# Altium PCB SSOP-TSSOP14.PcbDoc
Units mil, origin at the board's own origin, x right, y up, seen from the top; angles counter-clockwise.
Board outline 800 x 700 mil, 2 copper layers (Top Layer, Bottom Layer); 3 components, 14 nets, 28 pads, 0 vias.
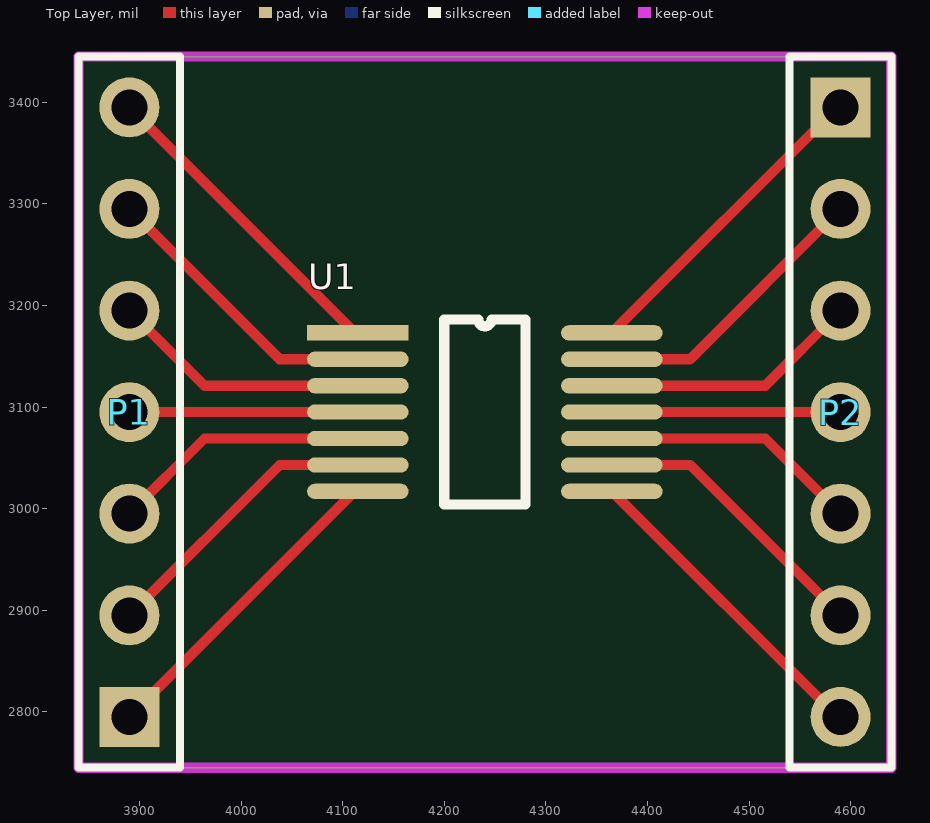
[diagram p0: Top Layer view]
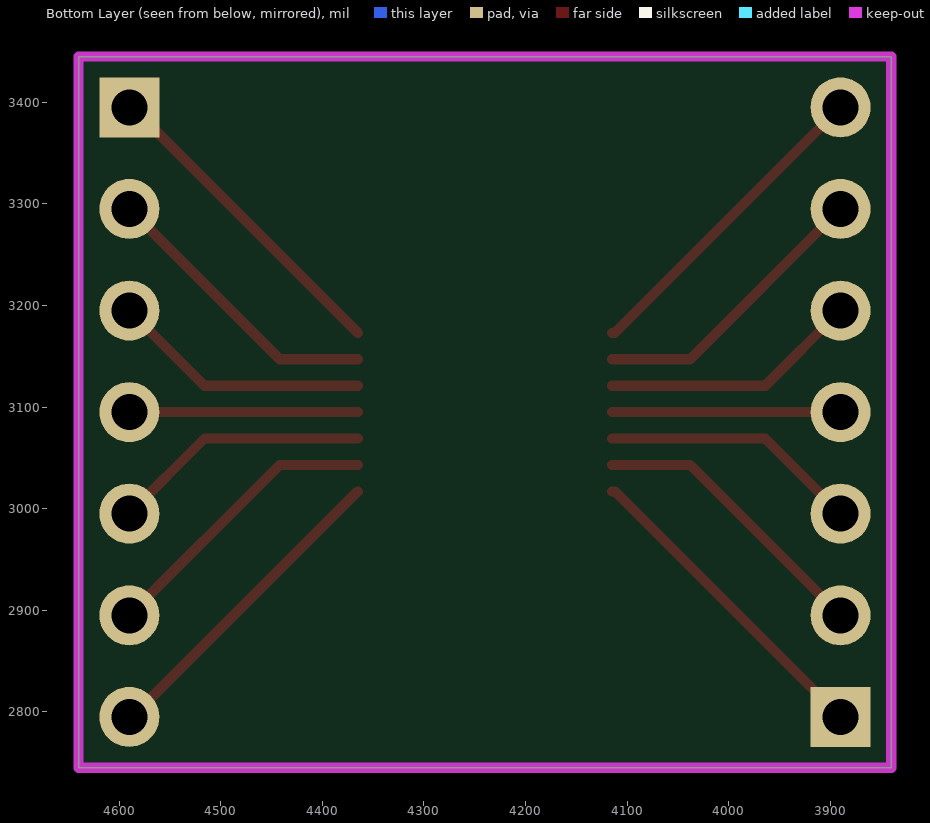
[diagram p1: Bottom Layer view, seen from below]

## Layer stack, top to bottom
Top Solder: solder mask 0.4, Solder Resist, Dk 3.5
Top Layer: signal copper 1.4
Dielectric 1: dielectric 12.6, FR-4, Dk 4.8
Bottom Layer: signal copper 1.4
Bottom Solder: solder mask 0.4, Solder Resist, Dk 3.5

## Board outline
3840,2745 3840,3445 4640,3445 4640,2745

## Design rules (kind name [scope] priority, off if disabled: settings)
Clearance [All] p1: gap=10 ignorepadtopadclearanceinfootprint=FALSE except(0: Arc-Hole Track-Hole SMDPad-Hole THPad-Hole Via-Hole Fill-Hole Poly-Hole Region-Hole Text-Hole)
PolygonConnect [All] p1: connectstyle=Relief reliefconductorwidth=10 reliefentries=4 polygonreliefangle="90 Angle" airgapwidth=10
RoutingVias [All] p1: holewidth=28 width=50 viastyle="Through Hole" minholewidth=28 minwidth=50 maxholewidth=28 maxwidth=50
SolderMaskExpansion [All] p1: expansion=4
Width [All] p1: maxlimit=10 minlimit=10 preferedwidth=10
30 further rules are at their usual default settings.

## Components (designator, comment, footprint, x,y, rotation, side; value= is the part's Value field where it differs from the comment)
P1 "Header 7" HDR1X7 3890,2795 r90 top
P2 "Header 7" HDR1X7 4590,3395 r270 top
U1 "SSOP_TSSOP14" SSOP-TSSOP14 4115,3173 r0 top

## Footprints (in the part's own frame and the unit in brackets; to place one, negate y for a bottom-side part, rotate by r counter-clockwise, add the part's x,y. Pads: shape width x height; smd on the part's side, far side on the other; paste and mask are expansions set on the pad)
HDR1X7 [mm] "Connector; Header; 7 Position"
  rect 1.5x1.5 hole 0.9: 1(0,0)
  round 1.5 hole 0.9: 2(2.54,0) 3(5.08,0) 4(7.62,0) 5(10.16,0) 6(12.7,0) 7(15.24,0)
  silkscreen extent -1.27,-1.27 16.51,1.27
SSOP-TSSOP14 [mil]
  rect 100x15 smd: 1(0,0)
  oval 100x15 smd: 2(0,-26) 3(0,-52) 4(0,-78) 5(0,-104) 6(0,-130) 7(0,-156) 8(250,-156) 9(250,-130) 10(250,-104) 11(250,-78) 12(250,-52) 13(250,-26) 14(250,0)
  silkscreen extent 85,-169 165,13

## Part data
P1 P2: "Header, 7-Pin", LatestRevisionDate=17-Jul-2002, LatestRevisionNote="Re-released for DXP Platform.", Publisher="Altium Limited"

## Nets (pads, with @x,y where several pads share a name; then routed paths per layer and width w, separated by ;. In a path a pad name is that pad's centre, name@x,y a point inside that pad or via, vN(x,y) a via of type N, cw(c..) or ccw(c..) an arc to the next point about the centre after c; other vN are vias at no path point)
NetP1_1: P1.1 U1.7 | length 317
  Top Layer w10: P1.1 4112,3017 U1.7
NetP1_2: P1.2 U1.6 | length 286.3
  Top Layer w10: P1.2 4038,3043 U1.6
NetP1_3: P1.3 U1.5 | length 255.7
  Top Layer w10: P1.3 3964,3069 U1.5
NetP1_4: P1.4 U1.4 | length 225
  Top Layer w10: P1.4 U1.4
NetP1_5: P1.5 U1.3 | length 255.7
  Top Layer w10: P1.5 3964,3121 U1.3
NetP1_6: P1.6 U1.2 | length 286.3
  Top Layer w10: P1.6 4038,3147 U1.2
NetP1_7: P1.7 U1.1 | length 317
  Top Layer w10: P1.7 4112,3173 U1.1
NetP2_1: P2.1 U1.14 | length 317
  Top Layer w10: U1.14 4587,3395 P2.1
NetP2_2: P2.2 U1.13 | length 286.3
  Top Layer w10: U1.13 4442,3147 P2.2
NetP2_3: P2.3 U1.12 | length 255.7
  Top Layer w10: U1.12 4516,3121 P2.3
NetP2_4: P2.4 U1.11 | length 225
  Top Layer w10: U1.11 P2.4
NetP2_5: P2.5 U1.10 | length 255.7
  Top Layer w10: U1.10 4516,3069 P2.5
NetP2_6: P2.6 U1.9 | length 286.3
  Top Layer w10: U1.9 4442,3043 P2.6
NetP2_7: P2.7 U1.8 | length 317
  Top Layer w10: U1.8 4587,2795 P2.7

## Keep-outs
Keep-Out Layer:
  the board outline again, w10